# Altium PCB PCB1.PcbDoc
Units mil, origin at the board's own origin, x right, y up, seen from the top; angles counter-clockwise.
Board outline 6000 x 4000 mil, 2 copper layers (Top Layer, Bottom Layer); 82 components, 0 nets, 246 pads, 237 vias.
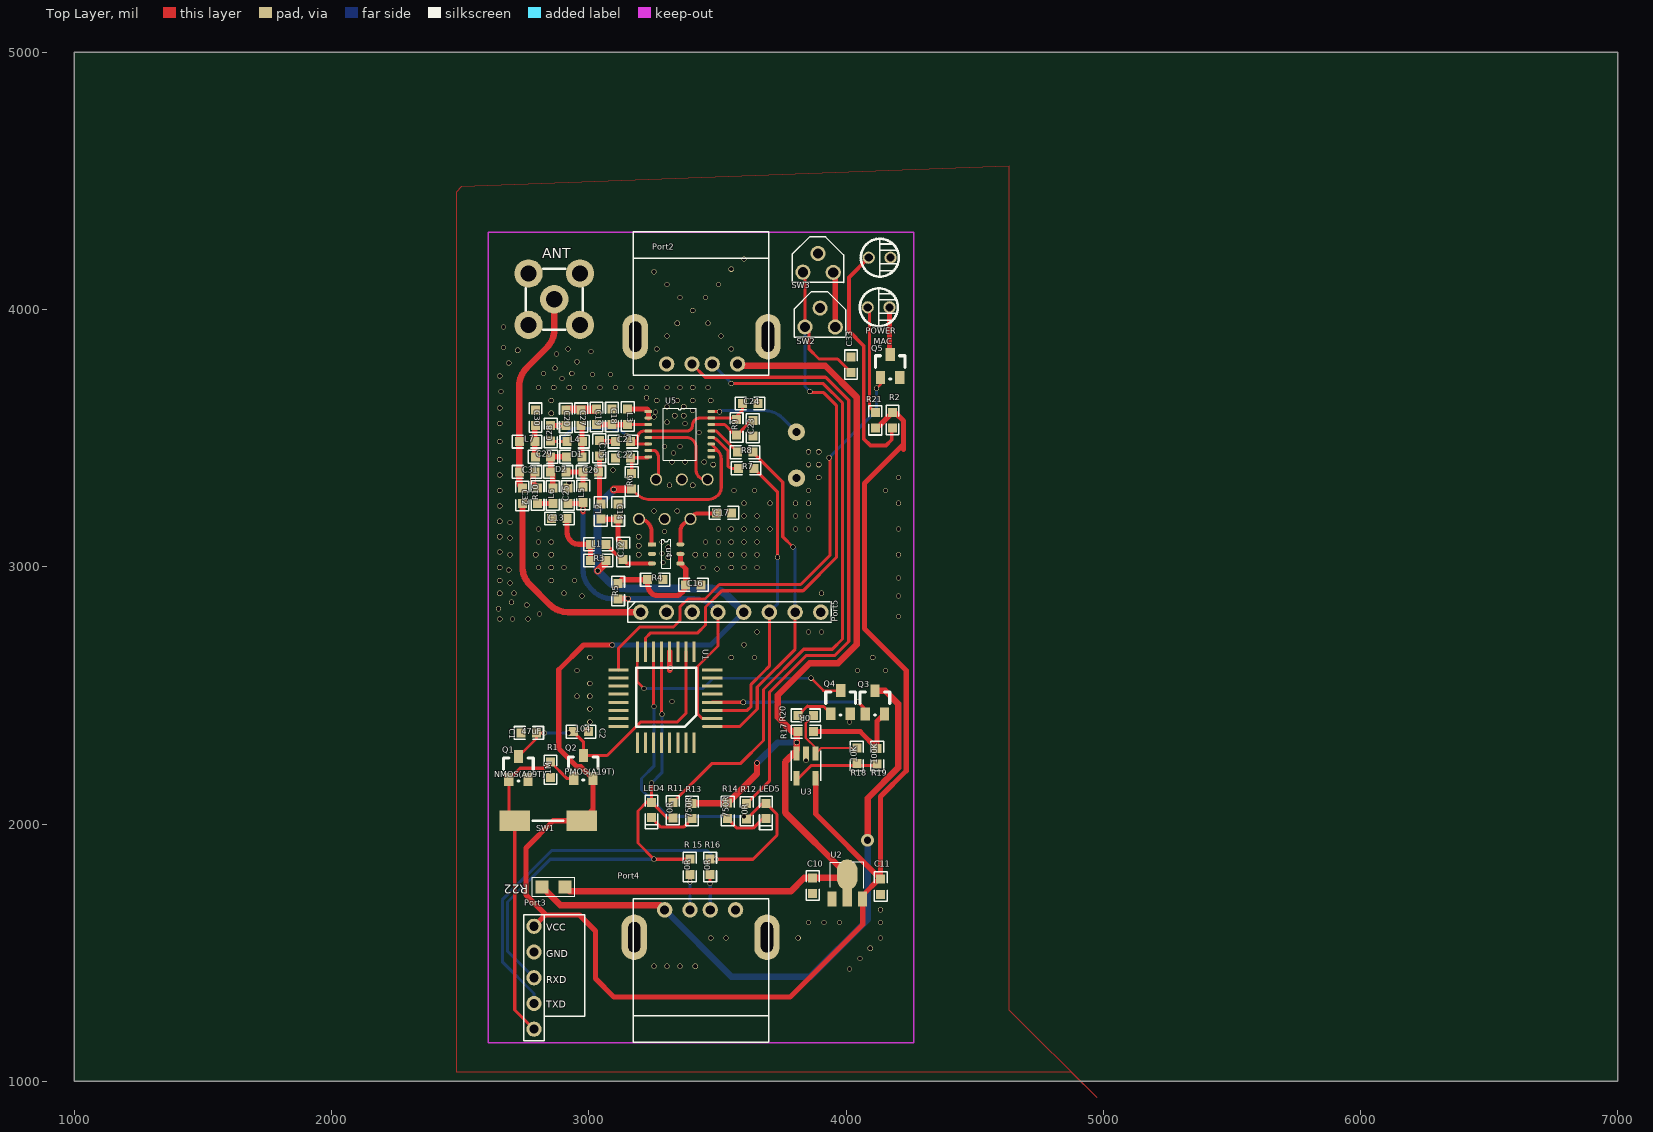
[diagram p0: Top Layer view]
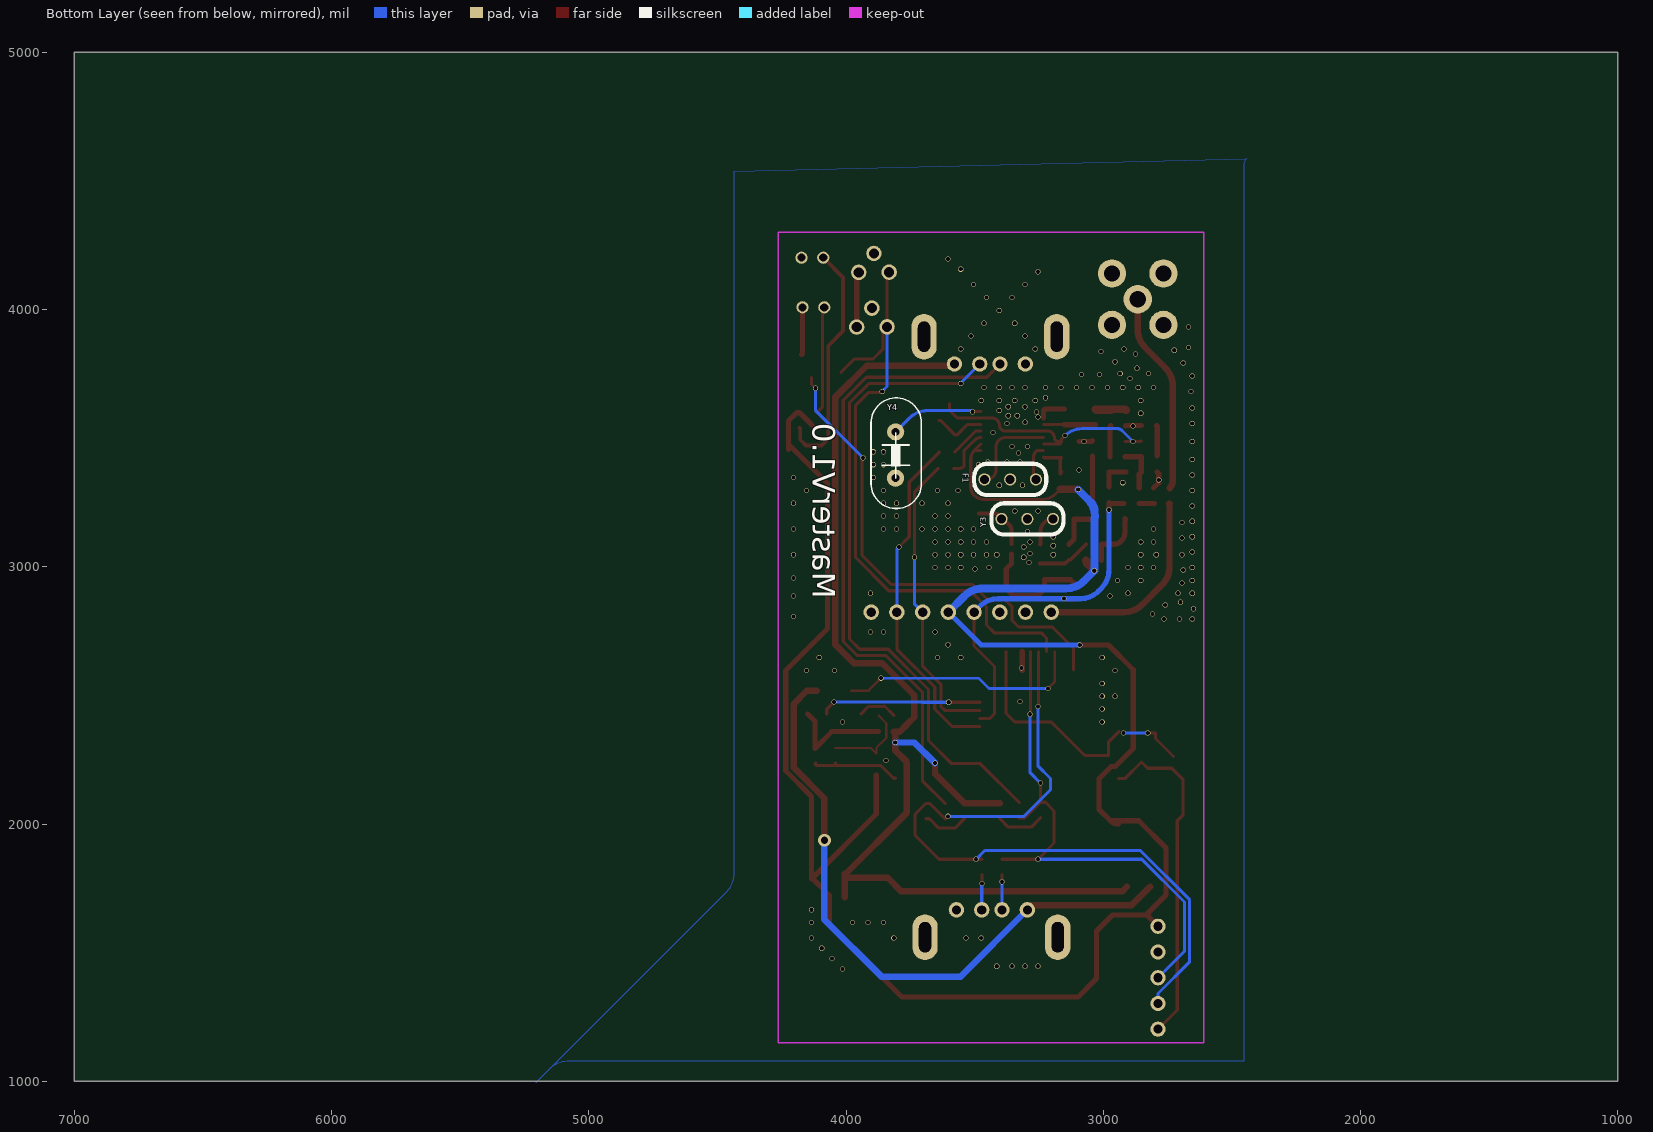
[diagram p1: Bottom Layer view, seen from below]

## Layer stack, top to bottom
Top Layer: signal copper 1.4
Dielectric: dielectric 12.6, FR-4, Dk 4.8
Bottom Layer: signal copper 1.4

## Board outline
1000,1000 7000,1000 7000,5000 1000,5000

## Design rules (kind name [scope] priority, off if disabled: settings)
Clearance [All] p1: gap=10
PolygonConnect [All] p1: connectstyle=Relief reliefconductorwidth=10 reliefentries=4 polygonreliefangle="90 Angle"
RoutingVias [All] p1: holewidth=28 width=50 viastyle="Through Hole" minholewidth=28 minwidth=50 maxholewidth=28 maxwidth=50
SilkscreenOverComponentPads [All] p1: minsilkscreentomaskgap=10
SolderMaskExpansion [All] p1: expansion=4
Width [All] p1: maxlimit=10 minlimit=10 preferedwidth=10
27 further rules are at their usual default settings.

## Components (designator, comment, footprint, x,y, rotation, side; value= is the part's Value field where it differs from the comment)
ANT "SMA" SWA-KE天线母座 2865.91,4040.16 r0 top
C1 "47uF" 0603 2737.09,2354.02 r0 top
C2 "104" 0603 2999.76,2359.06 r180 top
C10 "10uF" 0603 3870.7,1790.49 r270 top
C11 "104" 0603 4134.48,1786.55 r270 top
C12 "220pF5%" 0603 3133.62,3087.4 r270 top
C13 "104" 0603 2856.06,3187.48 r0 top
C14 "4.7pF5%" 0603 3113.94,3244.88 r270 top
C15 "12pF5%" 0603 3041.1,3490.63 r270 top
C16 "104" 0603 3436.77,2929.92 r180 top
C17 "1pF" 0603 3495.83,3209.45 r0 top
C18 "NC" 0603 3090.08,3612.36 r270 top
C19 "1pF5%" 0603 3030.08,3612.36 r270 top
C20 "NC" 0603 2911.18,3608.74 r270 top
C21 "104" 0603 3163.15,3486.69 r180 top
C22 "104" 0603 3163.15,3423.7 r180 top
C23 "104" 0603 3637.56,3508.66 r90 top
C24 "104" 0603 3657.24,3634.65 r180 top
C25 "NC" 0603 2919.05,3246.54 r90 top
C26 "NC" 0603 2978.11,3368.58 r0 top
C27 "NC" 0603 2970.23,3549.69 r90 top
C28 "1045%" 0603 2852.12,3549.69 r270 top
C29 "220pF5%" 0603 2852.12,3427.64 r180 top
C30 "NC" 0603 2793.07,3549.69 r90 top
C31 "NC" 0603 2730.08,3368.58 r0 top
C32 "NC" 0603 2741.89,3305.59 r270 top
C33 "NC" 0603 4019.45,3815.75 r270 top
D1 "SMP1320" 0603 2974.17,3427.64 r180 top
D2 "SMP1320" 0603 2911.18,3368.58 r180 top
F1 "10.7M" "PT4450 XTAL" 3361.69,3339.65 r0 bottom
L1 "180nH5%" 0603 3066.69,3087.4 r180 top
L2 "22nH5%" 0603 3047.01,3244.88 r270 top
L3 "47nH5%" 0603 3151.34,3553.62 r90 top
L4 "180nH5%" 0603 2915.12,3486.69 r0 top
L5 "180nH5%" 0603 2978.11,3309.53 r270 top
L6 "180nH5%" 0603 2860,3246.54 r90 top
L7 "0R" 0603 2730.08,3486.69 r0 top
LED4 "RX" LED-0603 3243.86,2024.41 r90 top
LED5 "TX" LED-0603 3688.74,2020.47 r90 top
MAC "MAC" 2.54LED 4176.93,4008.66 r0 top
Port2 "USB_A" USB-A 3440.71,3788.19 r180 top
Port3 "DEBUG" STC_DEBUG 2787.17,1402.36 r0 top
Port4 "USB_B" USB-A 3432.83,1666.14 r0 top
Port5 "Mold" Pin-8 3602.13,2823.62 r90 top
POWER "POWER" 2.54LED 4180.87,4201.57 r0 top
Q1 "NMOS(A09T)" SOT-23 2724.17,2217.32 r0 top
Q2 "PMOS(A19T)" SOT-23 2976.14,2221.26 r0 top
Q3 "AO3407(P)" SOT-23 4110,2473.23 r0 top
Q4 "9014" SOT-23 3976.14,2473.61 r0 top
Q5 "NMOS(A09T)" SOT-23 4169.06,3780.32 r0 top
R1 "1M" 0603 2851.26,2180.79 r90 top
R2 "2.2K" 0603 4180.87,3540.16 r90 top
R3 "0R" 0603 3066.69,3024.41 r180 top
R4 "100k" 0603 3228.11,2949.61 r0 top
R5 "0R" 0603 3113.94,2875.62 r90 top
R6 "10R" 0603 3167.08,3301.66 r90 top
R7 "10K" 0603 3641.5,3382.68 r180 top
R8 "10K" 0603 3637.56,3445.67 r180 top
R9 "5.1M" 0603 3574.57,3571.65 r270 top
R10 "3.3K" 0603 2800.94,3246.54 r90 top
R11 "0R" 0603 3326.54,2083.46 r270 top
R12 "0R" 0603 3613.94,2079.53 r270 top
R13 "750R" 0603 3401.34,2020.47 r90 top
R14 "750R" 0603 3539.7,2020.91 r90 top
R16 "0R" 0603 3471.56,1803.04 r90 top
R17 "RES" 0603 3874.03,2358.98 r180 top
R18 "10K" 0603 4042.23,2234.76 r90 top
R19 "100K" 0603 4120.97,2293.82 r270 top
R20 "0R" 0603 3873.78,2422.05 r180 top
R21 "0R" 0603 4113.94,3599.21 r270 top
R22 "0R" 0805 2858.03,1760.63 r180 top
"R 15" "0R" 0603 3392.82,1803.04 r90 top
SW1 "REST" SW-1 2901.34,1933.86 r270 top
SW2 "REST" Key1 3956.46,3929.92 r180 top
SW3 "REST" Key1 3948.58,4142.52 r180 top
U1 "STC8F2K32S2" LQPF-32 3444.65,2343.31 r180 top
U2 "HT7533-1" 3A5A3D 4004.88,1708.73 r0 top
U3 "LM321" AD8628 3842.28,2229.13 r180 top
u4 "PT4450" PT4450 3243.86,3083.46 r270 top
U5 "PT4302" PT4302 3231.77,3603.43 r0 top
Y3 "433.92M" "PT4450 XTAL" 3295.04,3185.83 r180 bottom
Y4 "13.226M" "PT4306 XTAL" 3806.85,3524.41 r270 bottom

## Footprints (in the part's own frame and the unit in brackets; to place one, negate y for a bottom-side part, rotate by r counter-clockwise, add the part's x,y. Pads: shape width x height; smd on the part's side, far side on the other; paste and mask are expansions set on the pad)
2.54LED [mm]
  round 1.2 hole 0.8: 1(-2.35,0) 2(-0.2,0)
  silkscreen extent -3.12,-1.87 0.62,1.9
3A5A3D [mm]
  rect 0.9x1.5 smd: 1(-1.524,0) 3(1.524,0)
  rect 0.9x1.8 smd: 2(0,0.15)
  oval 2x3 smd: 2(0,2.4)
  silkscreen extent -1.68,1.07 1.63,3.67
0603 [mil]
  rect 35x35 smd: 1(0,0) 2(60,0)
  silkscreen extent -27,-25 87,25
0805 [mil]
  rect 50x50 smd: 1(-50,5) 2(40,5)
  silkscreen extent -88,-32 78,42
AD8628 [mil]
  rect 24x56 smd: 1(-39.61,-44.88) 2(-2.61,-44.88) 3(34.39,-44.88) 4(34.39,51.12) 5(-39.61,51.12)
  silkscreen extent -60,-55 54,60
Key1 [mm]
  round 1.5 / inner round 1.524 / far side round 1.524 hole 1: 1(2.95,-0.067) 2(-0.05,-0.05) ""(1.45,-1.92)
  silkscreen extent -1.07,-3.55 4.01,0.95
LED-0603 [mil]
  rect 35x35 smd: 1(0,0) 2(60,0)
  silkscreen extent -43,-25 87,25
LQPF-32 [mm]
  oct 2x0.3 smd: 1(-0.9,-0.9)
  rect 2x0.3 smd: 2(-0.9,-1.7) 3(-0.9,-2.5) 4(-0.9,-3.3) 5(-0.9,-4.1) 6(-0.9,-4.9) 7(-0.9,-5.7) 8(-0.9,-6.5) 17(8.35,-6.5) 18(8.35,-5.7) 19(8.35,-4.9) 20(8.35,-4.1) 21(8.35,-3.3) 22(8.35,-2.5) 23(8.35,-1.7) 24(8.35,-0.9)
  rect 0.3x2 smd: 9(0.9,-8.3) 10(1.7,-8.3) 11(2.5,-8.3) 12(3.3,-8.3) 13(4.1,-8.3) 14(4.9,-8.3) 15(5.7,-8.3) 16(6.5,-8.3) 25(6.5,0.7) 26(5.7,0.7) 27(4.9,0.7) 28(4.1,0.7) 29(3.3,0.7) 30(2.5,0.7) 31(1.7,0.7) 32(0.9,0.7)
  silkscreen extent 0.7,-6.7 6.6,-0.9
Pin-8 [mil]
  round 60 hole 37.4: 1(0,400) 2(0,300) 3(0,200) 4(0,100) 5(0,0) 6(0,-100) 7(0,-200) 8(0,-300)
  silkscreen extent -40,-340 40,450
PT4302 [mil]
  rect 30x12 smd: 1(0,0)
  oval 30x12 smd: 2(0,-25.2) 3(0,-50.39) 4(0,-75.59) 5(0,-100.79) 6(0,-125.99) 7(0,-151.18) 8(0,-176.38) 9(244.09,-176.38) 10(244.09,-151.18) 11(244.09,-125.99) 12(244.09,-100.79) 13(244.09,-75.59) 14(244.09,-50.39) 15(244.09,-25.2) 16(244.09,0)
  silkscreen extent 58,-189 186,13
"PT4306 XTAL" [mil]
  round 66.93 hole 31: 1(0,0) 2(180,-1)
  silkscreen extent -132,-96 298,100
PT4450 [mm]
  rect 0.4x0.8 smd: 1(-0.1,0.05)
  oval 0.4x0.8 smd: 2(0.85,0.05) 3(1.8,0.05) 4(1.8,2.85) 5(0.85,2.85) 6(-0.1,2.85)
  silkscreen extent -0.57,1 2.28,1.89
"PT4450 XTAL" [mm]
  round 1.2 hole 0.889: 1(-2.54,0) 2(0,0) 3(2.54,0)
  silkscreen extent -3.56,-1.55 3.56,1.55
SOT-23 [mil]
  rect 36x50 smd: 1(40,-45) 2(-35,-45) 3(3,45)
  silkscreen extent -55,-50 60,40
STC_DEBUG [mm]
  round 1.5 hole 0.9: 1(0,5.08) 2(0,2.54) 3(0,0) 4(0,-2.54) 5(0,-5.08)
  silkscreen extent -1,-6.2 5,6.2
SW-1 [mm]
  rect 2x3 smd: 1(-2,1.8) 2(-2,-4.8)
  silkscreen extent -2,-3 -2,0
SWA-KE天线母座 [mm]
  round 2.8 hole 1.6: 1(0,0) 2(-2.54,-2.54) 2(-2.54,2.54) 2(2.54,-2.54) 2(2.54,2.54)
  silkscreen extent -2.8,-3 2.8,3
USB-A [mm]
  round 1.524 hole 0.9: 1(-3.5,0) 2(-1,0) 3(1,0) 4(3.5,0)
  oval 2.5x4.5 hole 1.2 slot 3 at 90 deg: 4(-6.5,-2.7) 4(6.6,-2.7)
  silkscreen extent -6.6,-13.05 6.8,1.1

## Part data
ANT L1 L2 L3 R1 R2 R3 R4 R5 R6 R7 R8 R9 R10 R11 R12 R13 R14 R16 R17 R18 R19 R20 R21 R22 "R 15": library part Res2, "Resistor"
C1 C2 C10 C11 C12 C13 C14 C15 C16 C17 C18 C19 C20 C21 C22 C23 C24 C25 C26 C27 C28 C29 C30 C31 C32 C33: library part Cap, "Capacitor"
D1 D2 LED4 LED5 MAC POWER: library part DIODE, "diode"
F1: library part Filter
L4 L5 L6 L7: library part L, "Inductor"
Port2 Port4: library part USB
Port3: library part PIN-5
Port5: library part Pin-8
Q1 Q5: library part MOSFET-N, "mosfet"
Q2 Q3: library part MOSFET-P, "mosfet"
Q4: library part 2N3904, "NPN General Purpose Amplifier"
SW1 SW2 SW3: library part SW-P, "key"
U1: library part STC8F2K64S2
U3: library part AD8628
Y3: library part PT4450-XTAL
Y4: library part XTAL, "Crystal Oscillator"

## Via types
v1: diameter 20, hole 16, Top Layer to Bottom Layer, 236 vias
v2: diameter 50, hole 28, Top Layer to Bottom Layer, 1 vias

## Nets (pads, with @x,y where several pads share a name; then routed paths per layer and width w, separated by ;. In a path a pad name is that pad's centre, name@x,y a point inside that pad or via, vN(x,y) a via of type N, cw(c..) or ccw(c..) an arc to the next point about the centre after c; other vN are vias at no path point)
pads on no net: "R 15.1" "R 15.2" ANT.1 ANT.2 C1.1 C1.2 C2.1 C2.2 C10.1 C10.2 C11.1 C11.2 C12.1 C12.2 C13.1 C13.2 C14.1 C14.2 C15.1 C15.2 C16.1 C16.2 C17.1 C17.2 C18.1 C18.2 C19.1 C19.2 C20.1 C20.2 C21.1 C21.2 C22.1 C22.2 C23.1 C23.2 C24.1 C24.2 C25.1 C25.2 C26.1 C26.2 C27.1 C27.2 C28.1 C28.2 C29.1 C29.2 C30.1 C30.2 C31.1 C31.2 C32.1 C32.2 C33.1 C33.2 D1.1 D1.2 D2.1 D2.2 F1.1 F1.2 F1.3 L1.1 L1.2 L2.1 L2.2 L3.1 L3.2 L4.1 L4.2 L5.1 L5.2 L6.1 L6.2 L7.1 L7.2 LED4.1 LED4.2 LED5.1 LED5.2 MAC.1 MAC.2 Port2.1 Port2.2 Port2.3 Port2.4 Port3.1 Port3.2 Port3.3 Port3.4 Port3.5 Port4.1 Port4.2 Port4.3 Port4.4 Port5.1 Port5.2 Port5.3 Port5.4 Port5.5 Port5.6 Port5.7 Port5.8 POWER.1 POWER.2 Q1.1 Q1.2 Q1.3 Q2.1 Q2.2 Q2.3 Q3.1 Q3.2 Q3.3 Q4.1 Q4.2 Q4.3 Q5.1 Q5.2 Q5.3 R1.1 R1.2 R2.1 R2.2 R3.1 R3.2 R4.1 R4.2 R5.1 R5.2 R6.1 R6.2 R7.1 R7.2 R8.1 R8.2 R9.1 R9.2 R10.1 R10.2 R11.1 R11.2 R12.1 R12.2 R13.1 R13.2 R14.1 R14.2 R16.1 R16.2 R17.1 R17.2 R18.1 R18.2 R19.1 R19.2 R20.1 R20.2 R21.1 R21.2 R22.1 R22.2 SW1.1 SW1.2 SW2. SW2.1 SW2.2 SW3. SW3.1 SW3.2 U1.1 U1.2 U1.3 U1.4 U1.5 U1.6 U1.7 U1.8 U1.9 U1.10 U1.11 U1.12 U1.13 U1.14 U1.15 U1.16 U1.17 U1.18 U1.19 U1.20 U1.21 U1.22 U1.23 U1.24 U1.25 U1.26 U1.27 U1.28 U1.29 U1.30 U1.31 U1.32 U2.1 U2.2 U2.3 U3.1 U3.2 U3.3 U3.4 U3.5 u4.1 u4.2 u4.3 u4.4 u4.5 u4.6 U5.1 U5.2 U5.3 U5.4 U5.5 U5.6 U5.7 U5.8 U5.9 U5.10 U5.11 U5.12 U5.13 U5.14 U5.15 U5.16 Y3.1 Y3.2 Y3.3 Y4.1 Y4.2
copper on no net: | length 49614.5
  Top Layer w8: 3873.78,2422.05 3843.53,2391.8 3843.53,2334.42 3881.89,2296.06 3881.89,2274.02 3902.64,2294.76 4042.23,2294.76
  Top Layer w10: 3188.74,2670.08 3188.74,2552.2 v1(3214.09,2526.85) ; v1(3864.09,2566.85) 3912.34,2518.61 3979.14,2518.61
  Top Layer w12: 2727.17,2262.32 2797.09,2332.24 2797.09,2354.02 v1(2826.93,2354.02) ; 2787.17,1202.36 2712.36,1277.17 2712.36,2012.6 2689.17,2035.79 2689.17,2172.32 2733.7,2216.85 2827.32,2216.85 2851.26,2240.79 2915.79,2176.26 2941.14,2176.26 ; 2852.12,3489.69 2855.12,3486.69 2915.12,3486.69 2914.96,3486.85 v1(2884.09,3486.85) ; v1(2921.26,2354.02) v1@2924.09,2356.85 ; 2939.76,2359.06 2979.14,2319.68 2979.14,2266.26 3071.5,2266.26 3202.09,2396.85 3344.09,2396.85 3377.72,2430.47 3377.72,2596.85 3377.72,2670.08 ; 3115.91,2599.21 3115.91,2683.66 3198.09,2765.85 3329.09,2765.85 3354.13,2790.88 3354.13,2843.5 3385.64,2875.02 3451.7,2875.02 3507.53,2930.85 3823.65,2930.85 3938.59,3045.79 3938.59,3428.35 v1(3934.09,3423.85) ; v1(3148.15,3509.8) 3163.15,3494.8 3163.15,3486.69 ; 3150.08,3552.36 cw(c3150.75,3552.36) 3150.75,3553.03 3231.77,3553.03 ; 3167.08,3301.66 3185.82,3282.92 ccw(c3239.09,3336.19) 3239.09,3260.85 3459.64,3260.85 ccw(c3459.64,3322.31) 3503.09,3278.85 ccw(c3474.12,3307.82) 3515.09,3307.82 3515.09,3419.88 ccw(c3474.12,3419.88) 3503.09,3448.85 ccw(c3494.9,3440.65) 3494.9,3452.25 3475.86,3452.25 3481.1,3452.25 ; 3220.24,2670.08 3220.24,2722.99 3239.09,2741.85 3422.09,2741.85 3454.13,2773.88 3454.13,2843.5 3517.47,2906.85 3833.59,2906.85 3962.59,3035.85 3962.59,3627.33 3913.08,3676.85 3864.09,3676.85 v1(3859.09,3681.85) ; 3231.77,3427.05 cw(c3228.42,3427.05) 3228.42,3423.7 3163.15,3423.7 ; 3231.77,3452.25 3250.32,3452.25 cw(c3250.32,3434.79) 3262.66,3447.13 cw(c3244.14,3428.62) 3270.33,3428.62 3270.33,3370.84 3270.33,3360.5 cw(c3240.84,3360.5) 3261.69,3339.65 ; 3231.77,3477.44 3194.72,3477.44 3172.4,3477.44 cw(c3172.4,3486.69) 3163.15,3486.69 ; 3231.77,3502.64 3378.99,3502.64 cw(c3378.99,3464.23) 3417.4,3464.23 ccw(c3417.4,3464.15) 3417.32,3464.15 3417.32,3375.74 ccw(c3453.42,3375.74) 3453.42,3339.65 3461.69,3339.65 ; 3243.86,2024.41 3280.3,1987.96 3368.83,1987.96 3401.34,2020.47 ; v1(3244.09,2158.85) 3243.86,2158.61 3243.86,2084.41 ; 3251.73,2670.08 3251.73,2459.21 v1(3254.09,2456.85) ; 3283.23,2670.08 3283.23,2427.72 v1(3284.09,2426.85) ; 3326.54,2023.46 3305.26,2023.46 3244.31,2084.41 3243.86,2084.41 ; 3326.54,2083.46 3477.92,2234.85 3589.09,2234.85 3679.09,2324.85 3679.09,2522.79 3835.65,2679.35 3946.52,2679.35 3986.59,2719.43 3986.59,3637.28 3912.02,3711.85 v1(3554.09,3711.85) ; 3392.82,1803.04 3393.46,1802.39 v1(3393.46,1775.41) ; 3392.82,1863.04 v1(3253.91,1863.04) 3191.09,1925.85 3191.09,2050.85 3224.65,2084.41 3243.86,2084.41 ; 3401.34,3788.19 3452.68,3736.85 3920.96,3736.85 4010.59,3647.22 4010.59,2709.48 3956.46,2655.35 3845.59,2655.35 3703.09,2512.85 3703.09,2168.69 3613.94,2079.53 ; v1(3471.09,1768.85) 3471.09,1802.57 3471.56,1803.04 ; 3471.56,1863.04 3638.28,1863.04 3732.09,1956.85 3732.09,2037.57 3689.2,2080.47 3688.74,2080.47 3675.34,2080.47 3614.39,2019.53 3613.94,2019.53 v1(3603.61,2029.85) ; 3475.86,3477.44 3499.09,3454.21 3499.09,3451.85 ; 3475.86,3527.84 3496.11,3527.84 3577.56,3446.39 3577.56,3445.67 ; 3475.86,3553.03 3528.36,3553.03 3569.74,3511.65 3575.02,3511.65 3632.03,3568.66 3637.56,3568.66 ; 3475.86,3603.43 v1@3507.98,3603.43 ; 3480.08,2378.74 3586.98,2378.74 3655.09,2446.85 3655.09,2532.73 3802.13,2679.76 3802.13,2823.62 ; 3480.08,2410.24 3440.84,2410.24 3422.71,2428.37 3422.71,2612.57 3502.13,2691.99 3502.13,2823.62 ; 3480.08,2441.73 3616.04,2441.73 3631.09,2456.79 3631.09,2542.67 3677.35,2588.93 3702.13,2613.71 3702.13,2823.62 3698.65,2820.15 ; 3480.08,2473.23 v1(3600.47,2473.23) ; 3500.52,3492.43 ccw(c3475.86,3467.77) 3475.86,3502.64 cw(c3475.86,3472.6) 3497.1,3493.84 cw(c3497.1,3491.43) 3498.81,3493.13 3540.09,3451.85 cw(c3537.68,3449.44) 3541.09,3449.44 3541.09,3389.85 3542.09,3389.85 ccw(c3559.41,3407.17) 3559.41,3382.68 3581.5,3382.68 3580.1,3382.68 ; v1(3507.88,3602.85) cw(c3509.57,3602.85) v1@3507.98,3603.43 ; 3539.7,2020.91 3576.58,1984.03 3638.89,1984.03 3675.34,2020.47 3688.74,2020.47 ; 3597.24,3634.65 3597.24,3607.48 3567.99,3578.23 3475.86,3578.23 3432.03,3578.23 ccw(c3432.03,3577.83) 3431.63,3577.83 ccw(c3431.63,3549.3) 3403.09,3549.3 3403.09,3548.99 cw(c3381.94,3548.99) 3381.94,3527.84 3231.77,3527.84 3215.69,3527.84 ccw(c3215.69,3502.29) 3190.15,3502.29 cw(c3174.55,3502.29) 3174.55,3486.69 3163.15,3486.69 ; 3637.56,3445.67 3754.09,3329.13 3754.09,3116.85 v1(3794.09,3076.85) ; 3641.5,3382.68 3734.09,3290.08 v1(3734.09,3036.85) ; 3807.89,2178.02 3815.26,2178.02 3864.09,2226.85 4114,2226.85 4120.97,2233.82 4116.94,2237.85 ; 3840.32,4137.29 3840.32,3932.57 3855.38,3932.57 3855.38,3847.57 3895.04,3807.91 3967.29,3807.91 4019.45,3755.75 ; 3850.13,2458.85 3813.78,2422.5 3813.78,2422.05 3848.58,2456.85 3912.9,2456.85 3941.14,2428.61 ; 4039.14,2237.85 4042.23,2234.76 ; v1(4047.34,2473.61) 4075,2445.94 4075,2428.23 ; 4084.41,4008.66 4090.59,4002.48 4090.59,3622.56 4113.94,3599.21 ; v1(4119.09,3693.85) 4122.24,3697 4134.06,3708.81 4134.06,3735.32 ; 3163.15,3365.59 ccw(c3167.08,3365.59) 3167.08,3361.66 ; 3163.15,3365.59 ccw(c3167.08,3365.59) 3167.08,3361.66 ; 3163.15,3365.59 ccw(c3167.08,3365.59) 3167.08,3361.66 ; 3163.15,3365.59 ccw(c3167.08,3365.59) 3167.08,3361.66 ; 3163.15,3423.7 cw(c3163.15,3419.77) 3167.08,3419.77 ; 3163.15,3423.7 cw(c3163.15,3419.77) 3167.08,3419.77 ; 3163.15,3423.7 cw(c3163.15,3419.77) 3167.08,3419.77 ; 3163.15,3423.7 cw(c3163.15,3419.77) 3167.08,3419.77 ; 3163.15,3423.7 cw(c3163.15,3419.77) 3167.08,3419.77 ; 3163.15,3423.7 cw(c3163.15,3419.77) 3167.08,3419.77 ; 3163.15,3423.7 3167.08,3423.7 3167.08,3361.66 ; 3167.08,3361.66 cw(c3176.59,3371.16) 3163.15,3371.16 ccw(c3176.59,3371.16) 3167.08,3361.66 ; v1@3507.98,3603.43 cw(c3509.57,3602.85) 3509.57,3604.53 cw(c3508.46,3604.53) 3508.46,3603.43 v1@3507.98,3603.43
  Top Layer w15: 2790.08,3432.58 ccw(c2797.07,3432.58) 2792.12,3427.64 ; 2790.08,3486.69 ccw(c2782.85,3493.92) 2793.07,3493.92 2793.07,3549.69 ; 3066.69,3087.4 3126.69,3027.4 3133.62,3027.4 3148.43,3012.6 3245.83,3012.6 ; 3244.09,3086.85 3244.09,3089.13 ; 3356.06,3087.4 3356.06,3138.82 cw(c3394.09,3138.82) 3394.09,3176.85 cw(c3424.09,3176.85) 3424.09,3206.85 3484.09,3206.85 ; 4088.35,4201.57 4011.09,4124.32 4011.09,3915.85 4069.09,3857.85 4069.09,3496.85 4095.09,3470.85 4155.09,3470.85 4178.09,3493.85 4178.09,3537.39 4180.87,3540.16 ; 3195.04,3185.83 cw(c3195.04,3136.77) 3244.09,3136.77 ; 3195.04,3185.83 cw(c3195.04,3136.77) 3244.09,3136.77 ; 3195.04,3185.83 cw(c3195.04,3136.77) 3244.09,3136.77 ; 3195.04,3185.83 cw(c3195.04,3136.77) 3244.09,3136.77 ; 3244.09,3089.13 ccw(c3245.83,3089.13) 3245.83,3087.4 ; 3244.09,3089.13 ccw(c3245.83,3089.13) 3245.83,3087.4 ; 3244.09,3089.13 ccw(c3245.83,3089.13) 3245.83,3087.4 ; 3244.09,3089.13 ccw(c3245.83,3089.13) 3245.83,3087.4 ; 3244.09,3089.13 ccw(c3245.83,3089.13) 3245.83,3087.4 ; 3244.09,3089.13 ccw(c3245.83,3089.13) 3245.83,3087.4 ; 3244.09,3089.13 ccw(c3245.83,3089.13) 3245.83,3087.4 ; 3244.09,3089.13 ccw(c3245.83,3089.13) 3245.83,3087.4 ; 3244.09,3089.13 ccw(c3245.83,3089.13) 3245.83,3087.4 ; 3244.09,3089.13 ccw(c3245.83,3089.13) 3245.83,3087.4 ; 3244.09,3089.13 3244.09,3136.77 ; 2851.18,3425.36 cw(c2854.4,3425.36) 2852.12,3427.64 ccw(c2854.4,3425.36) 2851.18,3425.36
  Top Layer w20: 2787.17,1602.36 2824.09,1639.29 2824.09,1646.85 ; 2790.08,3368.58 2784.09,3362.6 v1(2784.09,3336.85) 2784.09,3326.85 2804.09,3306.85 ; 2790.08,3432.58 2790.08,3486.69 2790.08,3542.46 ; 2800.94,3246.54 2860,3246.54 ; 2852.12,3549.69 2911.26,3549.69 2914.09,3546.85 ; 2860,3306.54 2860,3359.77 2851.18,3368.58 ; 2911.18,3368.58 2978.11,3368.58 2978.11,3309.53 ; 2914.01,3182.53 cw(c2921.02,3182.53) 2916.06,3187.48 2916.06,3134.06 ccw(c2964.86,3134.06) 2930.35,3099.56 ccw(c2959.7,3128.9) 2959.7,3087.4 3006.69,3087.4 3006.69,3024.41 ; 2914.17,3427.64 2852.12,3427.64 2852.12,3369.53 2851.19,3368.59 ; 2919.05,3246.54 2950.32,3246.54 2975.12,3246.54 2978.11,3249.53 2978.11,3212.83 cw(c2977.48,3212.83) 2977.93,3212.39 v1(2977.93,3221.8) ; 2941.43,1999.85 ccw(c2941.43,2043.38) 2972.2,2012.6 ; 2970.23,3549.69 2974.17,3545.75 2974.17,3427.64 ; 3030.08,3552.36 3090.08,3552.36 3150.08,3552.36 3151.34,3553.62 ; 3041.1,3430.63 3041.1,3250.79 3047.01,3244.88 ; 3041.1,3490.63 3044.88,3486.85 3094.09,3486.85 ; 3047.01,3184.88 3113.94,3184.88 3113.94,3107.09 3133.62,3087.4 ; v1(3091.09,2695.85) 2979.09,2695.85 2883.09,2599.85 2883.09,2293.85 2953.69,2223.26 2969.14,2223.26 3016.14,2176.26 3016.14,2056.54 2972.2,2012.6 ; 3113.94,2875.62 3154.09,2875.62 v1(3152.87,2876.85) ; 3113.94,2935.62 3127.92,2949.61 3228.11,2949.61 3228.11,2934.5 ccw(c3279.93,2934.5) 3243.29,2897.86 ccw(c3265.34,2919.91) 3265.34,2888.73 3343.76,2888.73 ccw(c3343.76,2905.42) 3355.56,2893.62 3366.1,2904.16 ccw(c3340.34,2929.92) 3376.77,2929.92 3376.77,2991.89 3356.06,3012.6 3356.06,3050 ; 3151.34,3613.62 3221.57,3613.62 cw(c3221.57,3603.43) 3231.77,3603.43 3231.77,3578.23 ; 3314.09,2596.85 ccw(c3314.09,2597.48) 3314.72,2597.48 3314.72,2670.08 ; 3874.03,2358.98 4055.81,2358.98 4120.97,2293.82 4120.97,2399.2 4150,2428.23 ; 3882.14,2189.75 3882.14,2038.89 4134.48,1786.55 ; 3950.55,4144.49 3958.43,4136.61 3958.43,3931.89 ; 4114.3,3538.85 4119.56,3538.85 4145.37,3564.66 4145.37,3565.11 4180.41,3600.16 4180.87,3600.16 4190.79,3600.16 4224.09,3566.85 4224.09,3476.85 ; 4160.24,3999.85 4169.06,4008.66 4169.06,3828.32 4172.06,3825.32 ; 4174.09,2656.85 4124.09,2706.85 ; 4224.09,3456.85 4224.09,3476.85 ; 2790.08,3542.46 cw(c2800.29,3542.46) 2793.07,3549.69 ccw(c2800.29,3542.46) 2790.08,3542.46 ; 2851.19,3368.59 ccw(c2848.9,3370.87) 2852.12,3370.87 cw(c2848.9,3370.87) 2851.19,3368.59 ; 2972.2,2012.6 2861.84,2012.6 2756.09,1906.85 2756.09,1723.85 2833.49,1646.46 2963.49,1646.46 3026.09,1583.85 3026.09,1398.85 3098.09,1326.85 3782.09,1326.85 4064.88,1609.63 4064.88,1708.73 4064.88,1723.06 4128.37,1786.55 4134.48,1786.55 ; 4124.09,2706.85 4071.59,2759.35 4071.59,3324.35 4224.09,3476.85 ; 4124.09,2706.85 4234.09,2596.85 4234.09,2206.85 4134.48,2107.24 4134.48,1786.55
  Top Layer w25: 2741.89,3305.59 cw(c2770.4,3334.11) 2730.08,3334.11 2730.08,3368.58 2730.08,3486.69 2730.08,3703.17 cw(c2830.08,3703.17) 2759.37,3773.88 2836.62,3851.13 ccw(c2765.91,3921.84) 2865.91,3921.84 2865.91,4040.16 ; 2743.36,3242.04 ccw(c2738.34,3242.04) 2741.89,3245.59 cw(c2740.42,3244.13) 2742.49,3244.13 2742.49,2996.88 ccw(c2834.07,2996.88) 2769.32,2932.12 2848.53,2852.91 ccw(c2919.24,2923.62) 2919.24,2823.62 3202.13,2823.62 ; 2818.03,1755.63 2888.81,1684.85 3276.33,1684.85 3295.04,1666.14 ; 2908.03,1755.63 2925.81,1737.85 3785.09,1737.85 3837.73,1790.49 3992.14,1790.49 4004.88,1803.22 3763.09,2045 3763.09,2240.7 3808.14,2285.75 3808.64,2286.25 3808.64,2353.59 ; 3401.34,2080.47 3401.78,2080.91 3539.7,2080.91 3654.09,2195.31 v1(3654.09,2236.85) ; 3578.5,3788.19 3585.29,3781.41 3919.54,3781.41 4041.09,3659.85 4041.09,2696.85 3969.09,2624.85 3859.09,2624.85 3735.09,2500.85 3735.09,2414.85 3759.62,2390.32 ; 3763.09,2386.85 3790.97,2358.98 3814.03,2358.98 3808.64,2353.59 ; 3808.14,2353.09 3808.64,2353.59 ; 4004.88,1714.64 4004.88,1807.07 ; v2(4084.09,1936.85) 4084.09,2099.98 4203.59,2219.48 4203.59,2466.85 4152.22,2518.23 4113,2518.23
  Top Layer w30: 2913.46,3609.69 ccw(c2913.46,3606.46) 2911.19,3608.75 2914.8,3612.36 3030.08,3612.36 3027.4,3609.69 2970.23,3609.69 ; v1@3034.92,2984.41 cw(c3035.05,2984.41) v1(3034.95,2984.5) 3060.91,3010.46 ccw(c3046.96,3024.41) 3066.69,3024.41 ; v1(3097.18,3299.88) cw(c3101.47,3295.59) 3101.47,3301.66 3167.08,3301.66 ; 3195.04,3185.83 3198.82,3182.05 ; 3395.04,3185.83 3401.18,3191.97
  Bottom Layer w10: v1(3214.09,2526.85) 3444.09,2526.85 3484.09,2566.85 v1(3864.09,2566.85)
  Bottom Layer w12: 2787.17,1302.36 2787.17,1340.8 2664.09,1463.88 2664.09,1705.09 2855.86,1896.85 3460.28,1896.85 v1(3494.09,1863.04) ; 2787.17,1402.36 2684.09,1505.43 2684.09,1696.8 2850.33,1863.04 v1(3253.91,1863.04) ; v1(2826.93,2354.02) v1(2921.26,2354.02) ; v1@2888.12,3486.85 v1(2884.09,3486.85) 2927.02,3529.78 cw(c2944.09,3512.71) 2944.09,3536.85 3082.84,3536.85 ; 2964.09,3536.85 3082.84,3536.85 ; v1(3244.09,2158.85) 3284.09,2198.85 v1(3284.09,2426.85) ; v1(3254.09,2456.85) 3254.09,2225.85 3205.09,2176.85 3205.09,2132.85 3308.09,2029.85 v1(3603.61,2029.85) ; 3393.46,1666.14 v1(3393.46,1775.41) ; v1(3471.09,1768.85) 3472.2,1767.74 3472.2,1666.14 ; 3480.08,3788.19 3554.09,3714.17 v1(3554.09,3711.85) ; v1(3507.88,3602.85) v1@3514.09,3602.85 ; v1@3514.09,3606.85 3682.99,3606.85 cw(c3682.99,3506.85) 3753.7,3577.56 3806.85,3524.41 ; v1(3600.47,2473.23) 3678.72,2473.23 ; 3702.13,2823.62 3734.09,2855.59 3734.09,2936.85 v1(3734.09,3036.85) ; v1(3794.09,3076.85) 3802.13,3068.82 3802.13,2823.62 ; 3840.32,3932.57 3840.32,3700.63 v1(3859.09,3681.85) ; v1(3934.09,3423.85) 4119.09,3608.85 v1(4119.09,3693.85) ; 4014.09,2473.61 3994.09,2473.61 ; v1(4047.34,2473.61) 3994.09,2473.61 ; 3082.84,3536.85 cw(c3082.84,3444.49) v1(3148.15,3509.8) ; 3082.84,3536.85 cw(c3082.84,3444.49) v1(3148.15,3509.8) ; 3082.84,3536.85 cw(c3082.84,3444.49) v1(3148.15,3509.8) ; 3082.84,3536.85 cw(c3082.84,3444.49) v1(3148.15,3509.8) ; 3678.72,2473.23 3703.72,2473.23 3704.09,2473.61 ; 3678.72,2473.23 3679.09,2473.61 3704.09,2473.61 ; 3704.09,2473.61 3994.09,2473.61
  Bottom Layer w20: v1@2978.23,3222.53 ccw(c2978.96,3221.8) v1(2977.93,3221.8) 2977.93,2987.19 ccw(c3077.93,2987.19) 3007.21,2916.48 3018.57,2905.12 ccw(c3089.28,2975.83) 3089.28,2875.83 ccw(c3089.79,2876.35) 3089.79,2875.62 3114.09,2875.62 3409.71,2875.62 cw(c3409.71,2778.06) 3478.7,2847.05 ; v1(3091.09,2695.85) 3474.35,2695.85 3602.13,2823.62
  Bottom Layer w25: 3295.04,1666.14 3554.33,1406.85 3714.09,1406.85 3862.09,1406.85 4084.09,1628.85 v2(4084.09,1936.85) ; v1(3654.09,2236.85) 3734.09,2316.85 v1(3808.64,2316.85)
  Bottom Layer w30: v1@3036.09,2987.25 cw(c3032.2,2987.25) v1(3034.95,2984.5) ; 3602.13,2823.62 3539.39,2886.35 ccw(c3468.68,2815.64) 3468.68,2915.64 3145.23,2915.64 cw(c3145.23,3015.64) 3074.52,2944.93 v1(3034.95,2984.5) ; 3033.14,3192.16 cw(c3025.2,3186.47) 3034.96,3186.47 v1(3034.95,2984.5) ; 3033.14,3192.16 ccw(c3025.2,3186.47) 3032.1,3193.38 cw(c3132.1,3193.38) 3033.14,3207.73 ; 3033.14,3192.16 3033.14,3207.73 ; 3033.14,3192.16 3033.14,2988.88 ccw(c3039.34,2988.88) v1(3034.95,2984.5) ; 3033.14,3207.73 cw(c3132.1,3193.38) 3061.39,3264.09 v1(3097.18,3299.88) 3046.03,3248.73 ccw(c3075.72,3219.03) 3033.73,3219.03 3033.73,3211.59 cw(c3031.71,3211.59) 3033.14,3210.17 3033.14,3207.73
  other v1: 4014.09,1436.85 3254.09,1446.85 3304.09,1446.85 3354.09,1446.85 3414.09,1446.85 4054.09,1476.85 4094.09,1516.85 3474.09,1556.85 3534.09,1556.85 3814.09,1556.85 4134.09,1556.85 3854.09,1616.85 3914.09,1616.85 3974.09,1616.85 4134.09,1616.85 4134.09,1666.85 3844.09,2246.85 3004.09,2396.85 4014.09,2396.85 3004.09,2446.85 3324.09,2476.85 2954.09,2496.85 3004.09,2496.85 3004.09,2546.85 2954.09,2596.85 4044.09,2596.85 4154.09,2596.85 3317.09,2607.09 3004.09,2646.85 3554.09,2646.85 3644.09,2646.85 4104.09,2646.85 3604.09,2696.85 3654.09,2746.85 3854.09,2746.85 3904.09,2746.85 2654.09,2796.85 2704.09,2796.85 2764.09,2796.85 4204.09,2806.85 2809.09,2816.85 2649.09,2836.85 2759.09,2851.85 2699.09,2861.85 2974.09,2886.85 4204.09,2886.85 2654.09,2896.85 2709.09,2896.85 2904.09,2896.85 3904.09,2896.85 2694.09,2936.85 2654.09,2946.85 2854.09,2946.85 2944.09,2946.85 4204.09,2956.85 2689.09,2986.85 3499.09,2991.85 2654.09,2996.85 2804.09,2996.85 2854.09,2996.85 2904.09,2996.85 3444.09,2996.85 3554.09,2996.85 3604.09,2996.85 3654.09,2996.85 3289.09,3016.85 3309.09,3036.85 2694.09,3046.85 2794.09,3046.85 2854.09,3046.85 3194.09,3046.85 3414.09,3046.85 3454.09,3046.85 3504.09,3046.85 3554.09,3046.85 3604.09,3046.85 3654.09,3046.85 4204.09,3046.85 3284.09,3051.85 2654.09,3056.85 3309.09,3076.85 3194.09,3081.85 2804.09,3096.85 2854.09,3096.85 3284.09,3096.85 3454.09,3096.85 3504.09,3096.85 3554.09,3096.85 3604.09,3096.85 3654.09,3096.85 2694.09,3111.85 2654.09,3116.85 3194.09,3116.85 3294.09,3136.85 2804.09,3146.85 3504.09,3146.85 3554.09,3146.85 3604.09,3146.85 3654.09,3146.85 3704.09,3146.85 3804.09,3146.85 3854.09,3146.85 4204.09,3146.85 2694.09,3171.85 2654.09,3176.85 3604.09,3196.85 3654.09,3196.85 3804.09,3196.85 3854.09,3196.85 3254.09,3216.85 3344.09,3216.85 2654.09,3236.85 3604.09,3246.85 3704.09,3246.85 3804.09,3246.85 3854.09,3246.85 4204.09,3246.85 2654.09,3296.85 3564.09,3296.85 3644.09,3296.85 3854.09,3296.85 4154.09,3296.85 3314.09,3316.85 3404.09,3316.85 2924.09,3326.85 3894.09,3346.85 4204.09,3346.85 2654.09,3356.85 3094.09,3376.85 3484.09,3396.85 3854.09,3396.85 3894.09,3396.85 3324.09,3406.85 3374.09,3406.85 3449.09,3406.85 2654.09,3416.85 3329.09,3441.85 3854.09,3446.85 3894.09,3446.85 3294.09,3466.85 3354.09,3466.85 2654.09,3486.85 3074.09,3486.85 3429.09,3521.85 2884.09,3546.85 2654.09,3556.85 3374.09,3556.85 3304.09,3561.85 3254.09,3581.85 3334.09,3586.85 3369.09,3586.85 2854.09,3596.85 3259.09,3601.85 3404.09,3606.85 2654.09,3616.85 3304.09,3621.85 3369.09,3621.85 2854.09,3646.85 3264.09,3646.85 3344.09,3646.85 3404.09,3646.85 3474.09,3646.85 3224.09,3656.85 2659.09,3681.85 2804.09,3696.85 2864.09,3696.85 2924.09,3696.85 2984.09,3696.85 3044.09,3696.85 3104.09,3696.85 3164.09,3696.85 3224.09,3696.85 3304.09,3696.85 3354.09,3696.85 3404.09,3696.85 3464.09,3696.85 2896.09,3731.85 2654.09,3741.85 3014.09,3746.85 3084.09,3746.85 2824.09,3751.85 2934.09,3751.85 2869.09,3771.85 2689.09,3791.85 2954.09,3796.85 2874.09,3826.85 3009.09,3836.85 2724.09,3841.85 2919.09,3846.85 3264.09,3846.85 3554.09,3846.85 2669.09,3851.85 3304.09,3896.85 3514.09,3896.85 2669.09,3931.85 3344.09,3946.85 3464.09,3946.85 3404.09,3996.85 3354.09,4046.85 3454.09,4046.85 3304.09,4096.85 3504.09,4096.85 3254.09,4146.85 3554.09,4156.85 3604.09,4196.85

## Polygon pours and split planes (outlines as drawn)
no net on Top Layer "Top Layer-No Net" (solid, remove dead copper, pour order 1000): 2504.09,4476.85 2484.09,4456.85 2484.09,1036.85 4874.09,1036.85 4974.09,936.85 4634.09,1276.85 4634.09,4556.85
no net on Bottom Layer "Top Layer-No Net" (solid, remove dead copper): 2444.09,4586.85 cw(c2419.95,4562.71) 2454.09,4562.71 2454.09,1076.85 5082.67,1076.85 cw(c5082.67,976.85) 5153.38,1047.56 5204.09,996.85 4463.38,1737.56 cw(c4534.09,1808.27) 4434.09,1808.27 4434.09,4536.85

## Keep-outs
Keep-Out Layer:
  lines w6: 2610,1150.39 4263.54,1150.39 4263.54,4300 2610,4300 2610,1150.39

## Other copper
Top Layer:
  pour cut-out: 3194.09,3596.85 2734.09,3596.85 2734.09,3226.85 3034.09,3226.85 3024.09,3236.85 3024.09,3426.85 3194.09,3426.85

## Silkscreen, mask and mechanical layers (free items; w line width, h text height)
Bottom Overlay:
  text "MasterV1.0" at 4158.9,2874.7 h150 r90

## Text inside footprints (layer, text, board x,y; h text height)
Port3: Top Overlay "VCC" at 2834.41,1575.59 h47.24; Top Overlay "GND" at 2834.41,1473.23 h47.24; Top Overlay "RXD" at 2834.41,1370.87 h47.24; Top Overlay "TXD" at 2834.41,1276.38 h47.24